# Altium PCB 拼板.PcbDoc (part 1 of 2)
Units mm, origin at the board's own origin, x right, y up, seen from the top; angles counter-clockwise.
Board outline 44.22 x 88.11 mm, 2 copper layers (Top Layer, Bottom Layer); 126 components, 77 nets, 529 pads, 164 vias.
Unrouted connection lines stored in the file: 26.
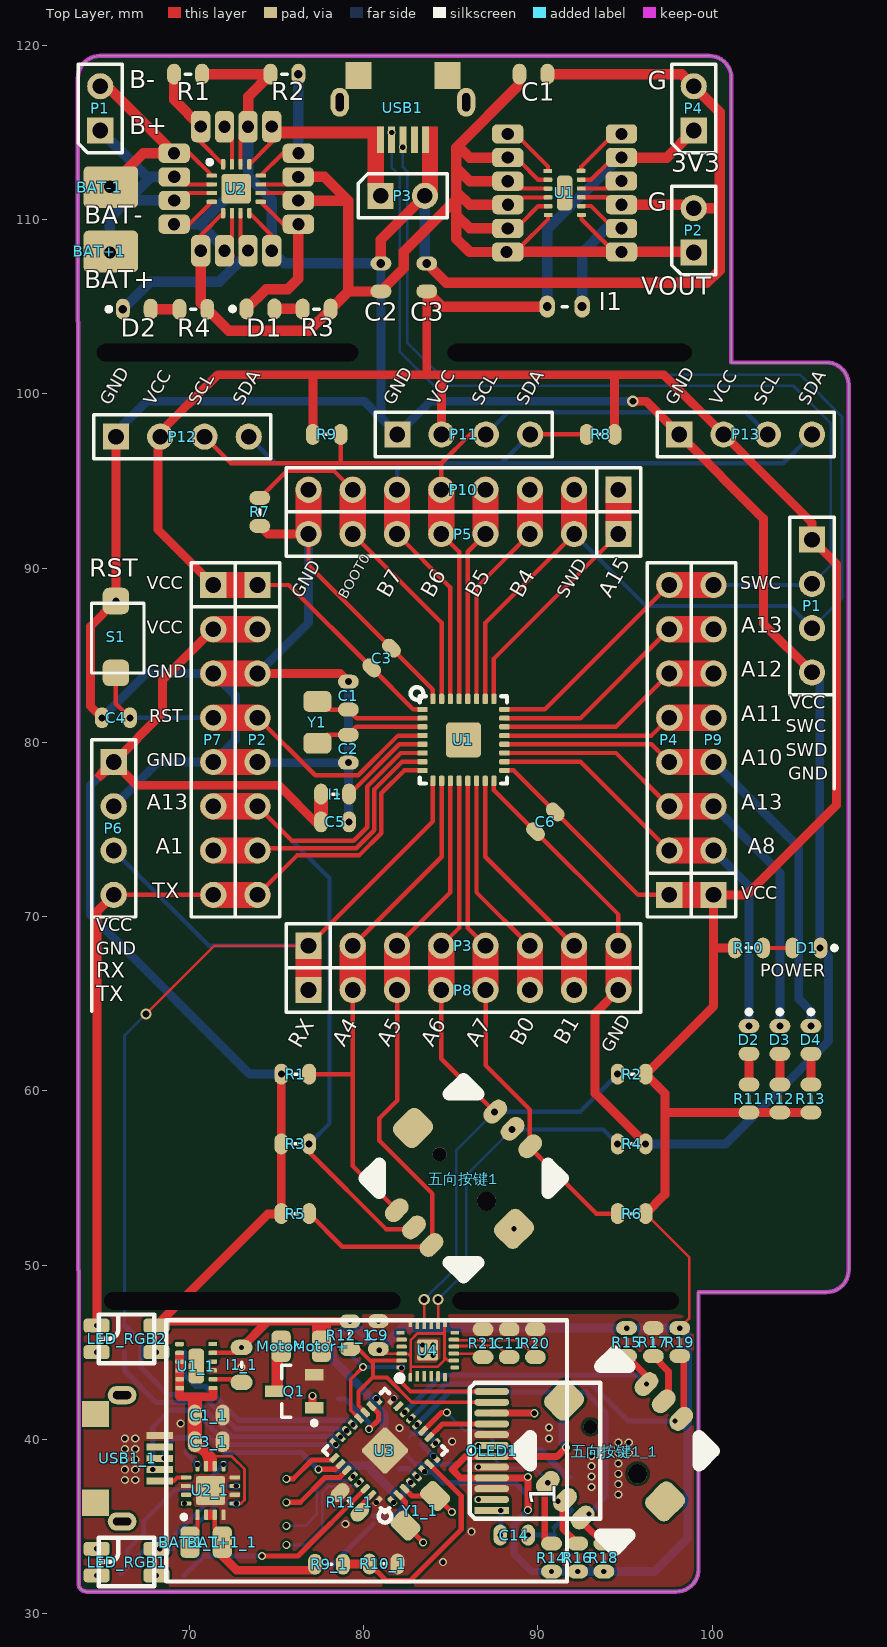
[diagram p0: Top Layer view]
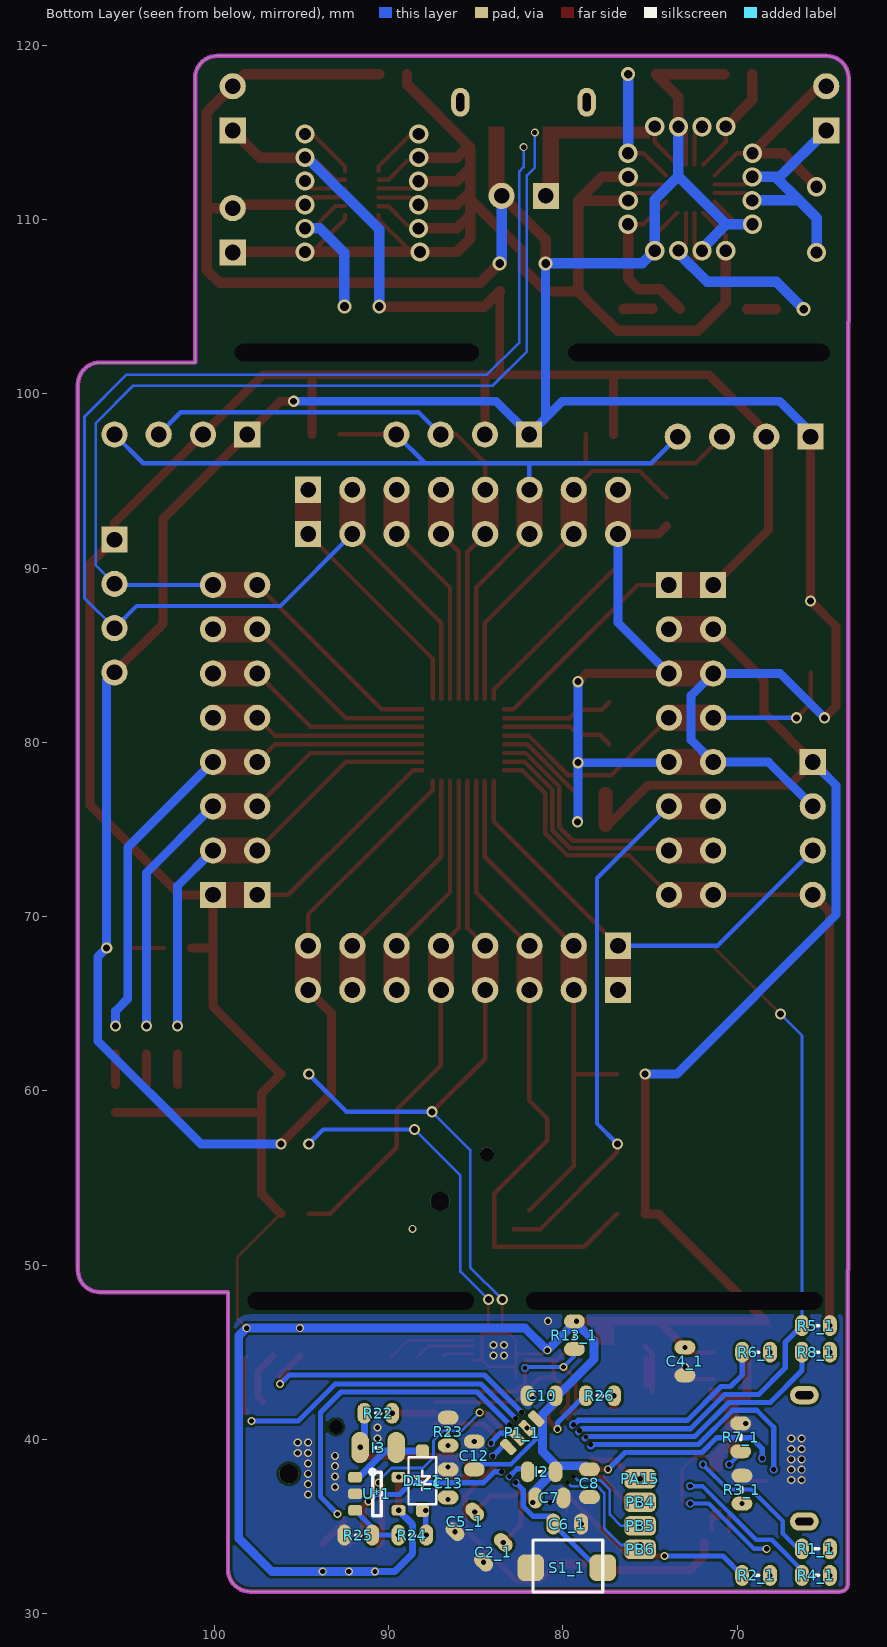
[diagram p1: Bottom Layer view, seen from below]
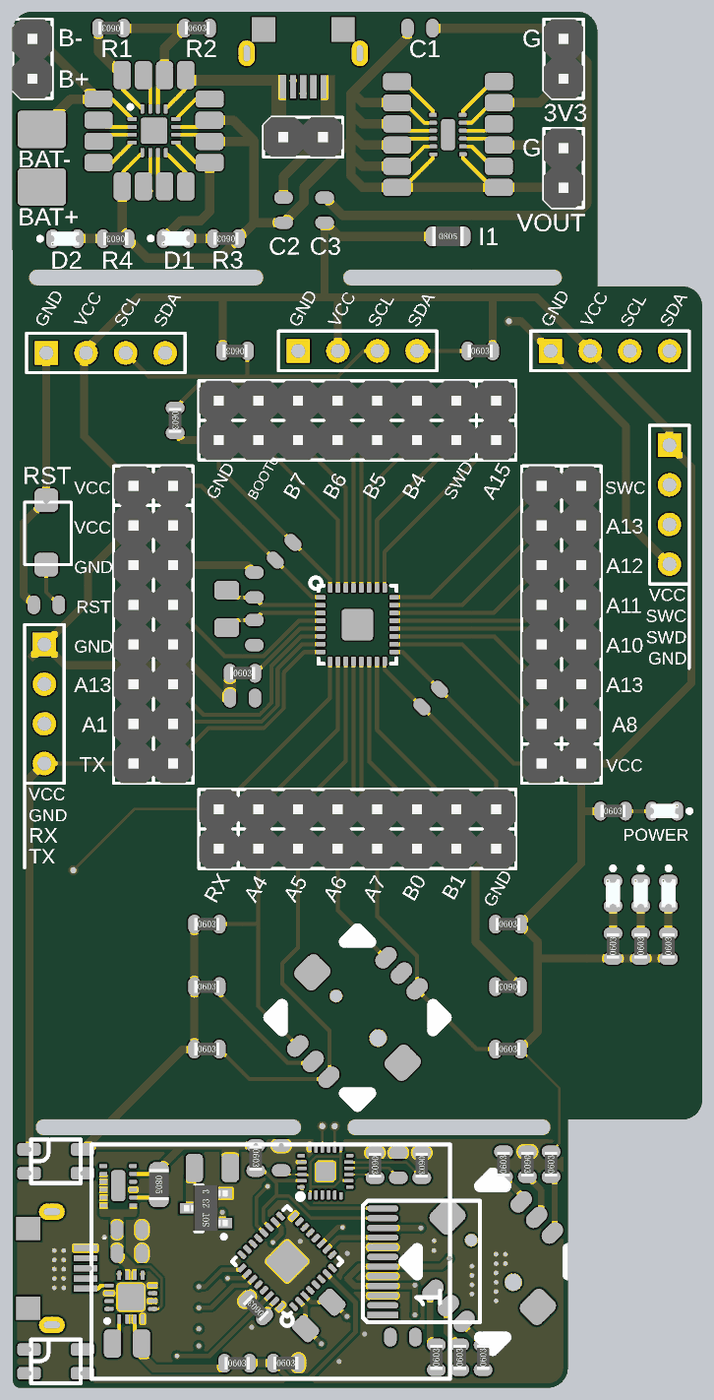
[diagram p3: 3D render of the assembled board from above, using the file's embedded part models]
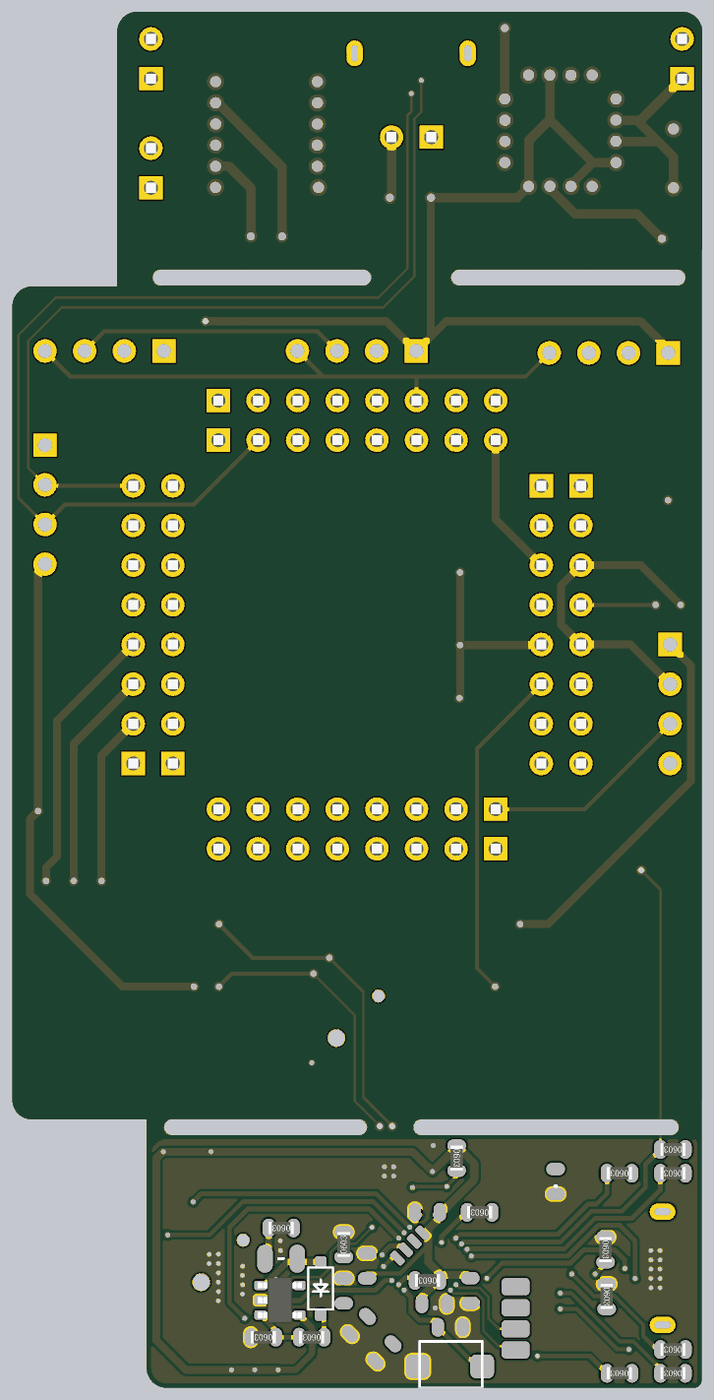
[diagram p4: 3D render of the assembled board from below, using the file's embedded part models]

## Layer stack, top to bottom
Top Solder: solder mask 0.0102, Solder Resist, Dk 3.5
Top Layer: signal copper 0.0356
Dielectric 1: dielectric 0.32, FR-4, Dk 4.8
Bottom Layer: signal copper 0.0356
Bottom Solder: solder mask 0.0102, Solder Resist, Dk 3.5

## Board outline
63.643,31.732 63.643,49.721 63.627,49.721 63.627,104.125 63.604,104.125 63.604,118.113 cw(c64.874,118.113) 64.874,119.383 67.089,119.383 99.83,119.383 cw(c99.83,118.113) 101.1,118.113 101.1,101.79 106.553,101.79 cw(c106.553,100.52) 107.823,100.52 107.823,49.721 cw(c106.553,49.721) 106.553,48.45 99.21,48.45 99.21,32.545 cw(c97.94,32.545) 97.94,31.275 64.101,31.275 cw(c64.101,31.732)

## Design rules (kind name [scope] priority, off if disabled: settings)
Clearance [All] p1: gap=0.152
ComponentClearance [All] p1: gap=0 collisioncheckmode=3 verticalgap=0 showdistances=FALSE
HoleSize [All] p1: absolutevalues=TRUE maxlimit=25.375 minlimit=0.025 maxpercent=80.000 minpercent=20.000
HoleToHoleClearance [All] p1: gap=0.051 allowstackedmicrovias=TRUE
MinimumSolderMaskSliver [All] p1: minsoldermaskwidth=0
PolygonConnect [All] p1: connectstyle=Direct reliefconductorwidth=0.254 reliefentries=4 polygonreliefangle="90 Angle" airgapwidth=0.254
RoutingVias [All] p1: holewidth=0.711 width=1.27 viastyle="Through Hole" minholewidth=0.025 minwidth=0.025 maxholewidth=25.375 maxwidth=25.375
SilkToSilkClearance [All] p1: silktosilkclearance=0
SilkToSolderMaskClearance [IsPad] p1: minsilkscreentomaskgap=0 clearancetoexposedcopper=TRUE
SolderMaskExpansion [All] p1: expansion=0.102
Width [All] p1: maxlimit=999 minlimit=0.152 preferedwidth=0.152
24 further rules are at their usual default settings.

## Components (designator, comment, footprint, x,y, rotation, side; value= is the part's Value field where it differs from the comment)
BAT+1 "BAT" BAT+ 64.849,108.166 r270 top
BAT+1_1 "BAT" BAT+ 71.892,34.094 r180 top (schematic designator BAT+1)
BAT-1 "BAT" BTA- 64.849,111.859 r270 top
BAT-1_1 "BAT" BTA- 70.031,34.094 r180 top (schematic designator BAT-1)
C1 "10uF" 1__0603-CAP_ 89.741,118.334 r180 top
C1 "4.3pF" 1__0603-CAP_ 79.121,82.677 r90 top
C1_1 "10uF" 1__0603-CAP_ 71.111,41.397 r180 top (schematic designator C1)
C2 "4.7uF" 1__0603-CAP_ 80.988,106.677 r90 top
C2 "4.3pF" 1__0603-CAP_ 79.121,79.629 r270 top
C2_1 "4.3pF" 1__0603-CAP_ 83.983,33.522 r315 bottom (schematic designator C2)
C3 "10uF" 1__0603-CAP_ 83.622,106.677 r90 top
C3 "104" 1__0603-CAP_ 81.026,84.836 r45 top
C3_1 "4.7uF" 1__0603-CAP_ 71.111,39.873 r0 top (schematic designator C3)
C4 "100nF" 1__0603-CAP_ 65.786,81.407 r0 top
C4_1 "10uF" 1__0603-CAP_ 72.997,44.479 r270 bottom (schematic designator C4)
C5 "104" 1__0603-CAP_ 78.359,75.438 r0 top
C5_1 "4.3pF" 1__0603-CAP_ 85.621,35.275 r315 bottom (schematic designator C5)
C6 "104" 1__0603-CAP_ 90.424,75.438 r225 top
C6_1 "100nF" 1__0603-CAP_ 79.747,35.148 r0 bottom (schematic designator C6)
C7 "104" 1__0603-CAP_ 80.769,36.647 r180 bottom
C8 "104" 1__0603-CAP_ 78.471,37.491 r270 bottom
C9 "104" 1__0603-CAP_ 80.841,45.989 r270 top
C10 "104" 1__0603-CAP_ 81.22,42.508 r0 bottom
C11 "104" 1__0603-CAP_ 88.351,45.524 r270 top
C12 "0.1uF" 1__0603-CAP_ 85.081,39.079 r90 bottom
C13 "4.7uF" 1__0603-CAP_ 86.58,37.479 r90 bottom
C14 "4.7pF" 1__0603-CAP_ 88.637,34.513 r180 top
D1 "LED" 1__0603-LED_ 74.076,104.866 r180 top
D1 "LED" 1__0603-LED_ 105.41,68.199 r0 top
D1_1 "Diode" 二极管1206 88.059,37.631 r90 bottom (schematic designator D1)
D2 "LED" 1__0603-LED_ 66.982,104.851 r180 top
D2 "LED" 1__0603-LED_ 102.108,62.928 r90 top
D3 "LED" 1__0603-LED_ 103.886,62.928 r90 top
D4 "LED" 1__0603-LED_ 105.664,62.928 r90 top
I1 "2.2uH" 1__0805_IND 91.531,104.999 r0 top
I1 "100uH" 1__0603_Ind_ 78.359,77.025 r0 top
I1_1 "2.2uH" 1__0805_IND 72.997,44.279 r270 top (schematic designator I1)
I2 "100uH" 1__0603_IND_ 81.214,38.145 r0 bottom
I3 "6.8uH" 0805_Ind 90.593,39.539 r180 bottom
LED_RGB1 "L*" 1__LED_RGB 64.678,33.726 r0 top
LED_RGB2 "L*" 1__LED_RGB 64.678,46.534 r0 top
Motor+ "BAT" BAT+ 77.582,45.334 r180 top
Motor- "BAT" BTA- 75.27,45.334 r180 top
OLED1 "0.73_OLED" 0.73OLED 94.333,39.344 r90 top
P1 "Header 2" HDR1X2 64.887,115.103 r90 top
P1 "" HDR1X4 105.727,91.63 r270 top
P1_1 "蓝牙" BT 81.521,41.191 r225 bottom (schematic designator P1)
P2 "Header 2" HDR1X2 98.941,108.107 r90 top
P2 "Header 8" HDR1X8 73.914,89.027 r270 top
P3 "Header 2" HDR1X2 80.973,111.354 r0 top
P3 "Header 8" HDR1X8 76.835,68.326 r0 top
P4 "Header 2" HDR1X2 98.941,115.103 r90 top
P4 "Header 8" HDR1X8 97.536,71.247 r90 top
P5 "Header 8" HDR1X8 94.615,91.948 r180 top
P6 "蓝牙" HDR1X4 65.659,78.867 r270 top
P7 "Header 8" HDR1X8 71.374,89.027 r270 top
P8 "Header 8" HDR1X8 76.835,65.786 r0 top
P9 "Header 8" HDR1X8 100.076,71.247 r90 top
P10 "Header 8" HDR1X8 94.615,94.488 r180 top
P11 "" HDR1X4 81.931,97.663 r0 top
P12 "" HDR1X4 65.786,97.536 r0 top
P13 "" HDR1X4 98.108,97.663 r0 top
PA15 "BAT" BAT+ 75.574,37.742 r90 bottom
PB4 "BAT" BAT+ 75.574,36.393 r90 bottom
PB5 "BAT" BAT+ 75.574,35.044 r90 bottom
PB6 "BAT" BAT+ 75.55,33.7 r270 bottom
Q1 "NPN-J3Y/Y1" SOT23 76.013,42.768 r180 top
R1 "1K" 1__0603-RES_ 69.925,118.334 r180 top
R1 "220K" 1__0603-RES_ 76.073,60.96 r0 top
R1_1 "4K7" 1__0603-RES_ 65.478,33.726 r0 bottom (schematic designator R1)
R2 "1K" 1__0603-RES_ 75.454,118.334 r0 top
R2 "220K" 1__0603-RES_ 95.377,60.96 r0 top
R2_1 "4K7" 1__0603-RES_ 68.907,32.202 r0 bottom (schematic designator R2)
R3 "4K7" 1__0603-RES_ 77.3,104.859 r180 top
R3 "220K" 1__0603-RES_ 76.073,56.959 r0 top
R3_1 "1K" 1__0603-RES_ 69.726,37.122 r270 bottom (schematic designator R3)
R4 "4K7" 1__0603-RES_ 70.226,104.846 r180 top
R4 "330" 1__0603-RES_ 95.377,56.959 r180 top
R4_1 "4K7" 1__0603-RES_ 65.478,32.202 r0 bottom (schematic designator R4)
R5 "220K" 1__0603-RES_ 76.073,52.959 r0 top
R5_1 "4K7" 1__0603-RES_ 65.478,46.534 r0 bottom (schematic designator R5)
R6 "220K" 1__0603-RES_ 95.377,52.959 r0 top
R6_1 "4K7" 1__0603-RES_ 68.907,45.01 r0 bottom (schematic designator R6)
R7 "10K" 1__0603-RES_ 74.041,93.218 r270 top
R7_1 "1K" 1__0603-RES_ 69.797,40.12 r270 bottom (schematic designator R7)
R8 "220K" 1__0603-RES_ 93.599,97.663 r0 top
R8_1 "4K7" 1__0603-RES_ 65.478,45.01 r0 bottom (schematic designator R8)
R9 "220K" 1__0603-RES_ 77.883,97.663 r180 top
R9_1 "5M" 1__0603-RES_ 78.013,32.843 r0 top (schematic designator R9)
R10 "4K7" 1__0603-RES_ 102.108,68.199 r0 top
R10_1 "5M" 1__0603-RES_ 81.138,32.856 r0 top (schematic designator R10)
R11 "4K7" 1__0603-RES_ 102.108,59.563 r90 top
R11_1 "10K" 1__0603-RES_ 79.214,36.388 r135 top (schematic designator R11)
R12 "4K7" 1__0603-RES_ 103.886,59.563 r90 top
R12_1 "220K" 1__0603-RES_ 79.209,45.983 r270 top (schematic designator R12)
R13 "4K7" 1__0603-RES_ 105.664,59.563 r90 top
R13_1 "220K" 1__0603-RES_ 79.341,45.981 r270 bottom (schematic designator R13)
R14 "220K" 1__0603-RES_ 90.783,33.224 r90 top
R15 "220K" 1__0603-RES_ 95.089,45.588 r90 top
R16 "220K" 1__0603-RES_ 92.282,33.224 r90 top
R17 "330" 1__0603-RES_ 96.619,45.588 r270 top
R18 "220K" 1__0603-RES_ 93.78,33.224 r90 top
R19 "220K" 1__0603-RES_ 98.137,45.588 r90 top
R20 "10K" 1__0603-RES_ 89.85,45.524 r270 top
R21 "10K" 1__0603-RES_ 86.853,45.524 r270 top
R22 "220K" 1__0603-RES_ 90.593,41.504 r0 bottom
R23 "510K" 1__0603-RES_ 86.58,40.45 r90 bottom
R24 "1.43M" 1__0603-RES_ 88.637,34.513 r0 bottom
R25 "205K" 1__0603-RES_ 91.736,34.513 r0 bottom
R26 "10K" 1__0603-RES_ 77.867,42.508 r0 bottom
S1 "" key3*4*2 65.786,86.042 r270 top
S1_1 "" KEY3*4*2 79.772,32.64 r180 bottom (schematic designator S1)
U1 "TPS62742" TPS62742 91.531,111.519 r180 top
U1 "STM32L432Kx" STM32L432#1 85.725,80.137 r0 top
U1_1 "TPS62742" TPS62742 70.393,44.213 r180 top (schematic designator U1)
U2 "BQ24078" BQ24078#1 72.69,111.763 r0 top
U2_1 "BQ24078" BQ24078#2 71.21,37.075 r90 top (schematic designator U2)
U3 "STM32L432Kx" STM32L432#2 81.22,39.365 r135 top
U4 "MPU9250" "1__QFN3*3 (改1)" 83.673,45.127 r90 top
U*1 "OLED升压" 1__SOT23-5 90.669,36.883 r180 bottom
USB1 "USB-5P" "1__Micro USB 立贴_" 82.253,113.822 r0 top
USB1_1 "USB-5P" "1__MICRO USB 立贴_" 69.042,38.92 r90 top (schematic designator USB1)
Y1 "32.768K" OSC32 77.331,79.944 r90 top
Y1_1 "32.768K" OSC32 84.109,36.748 r225 top (schematic designator Y1)
五向按键1 "五向按键" 1__五向按键_ 85.73,54.98 r45 top
五向按键1_1 "五向按键" 1__五向按键_ 94.398,39.344 r45 top (schematic designator 五向按键1)

## Footprints (in the part's own frame and the unit in brackets; to place one, negate y for a bottom-side part, rotate by r counter-clockwise, add the part's x,y. Pads: shape width x height; smd on the part's side, far side on the other; paste and mask are expansions set on the pad)
0.73OLED [mm]
  rect 0.4x2 smd: 1(-3.41,6.985)
  oval 0.4x2 smd: 2(-2.79,6.985) 3(-2.17,6.985) 4(-1.55,6.985) 5(-0.93,6.985) 6(-0.31,6.985) 7(0.31,6.985) 8(0.93,6.985) 9(1.55,6.985) 10(2.17,6.985) 11(2.79,6.985) 12(3.41,6.985)
  silkscreen extent -7.49,0.76 7.51,25.67
1__0603-CAP_ [mm]
  oval 0.8x1.2 smd: 1(-0.8,0) 2(0.8,0)
  body extent -0.88,-0.48 0.87,0.48, height 0.85
1__0603-LED_ [mm]
  oval 0.8x1.2 smd: 1(-0.8,0) 2(0.8,0)
  silkscreen extent 1.47,-0.12 1.72,0.12, body extent -0.9,-0.45 0.9,0.45, height 0.8
1__0603-RES_ [mm]
  oval 0.8x1.2 smd: 1(-0.8,0) 2(0.8,0)
  silkscreen extent -0.15,0 0.15,0, body extent -0.8,-0.4 0.8,0.4, height 0.45
1__0603_Ind_ [mm]
  oval 0.8x1.2 smd: 1(-0.8,0) 2(0.8,0)
  silkscreen extent -0.15,0 0.15,0, body extent -0.8,-0.4 0.8,0.4, height 0.45
1__0603_IND_ [mm]
  oval 0.8x1.2 smd: 1(-0.8,0) 2(0.8,0)
  silkscreen extent -0.15,0 0.15,0, body extent -0.8,-0.4 0.8,0.4, height 0.45
1__0805_IND [mm]
  oval 0.889x1.27 smd: 1(-1,0) 2(1,0)
  silkscreen extent -0.15,0 0.15,0, body extent -1,-0.63 1,0.63, height 0.55
1__LED_RGB [mm]
  rrect50% 1.5x0.8 smd: 1(0,0) 2(3.429,0) 3(0,-1.524) 4(3.429,-1.524)
  silkscreen extent 0.13,-2.16 3.3,0.64
"1__Micro USB 立贴_" [mm]
  oval 1.05x1.65 hole 0.45 slot 1.05 at 90 deg: 0(-3.625,2.9) 0(3.625,2.9)
  rect 1.5x1.55 smd: 0(-2.55,4.425) 0(2.55,4.425)
  rect 0.4x1.51 smd: 1(-1.3,0.75) 2(-0.65,0.75) 3(0,0.75) 4(0.65,0.75) 5(1.3,0.75)
"1__MICRO USB 立贴_" [mm]
  oval 1.05x1.65 hole 0.45 slot 1.05 at 90 deg: 0(-3.625,2.9) 0(3.625,2.9)
  rect 1.5x1.55 smd: 0(-2.55,4.425) 0(2.55,4.425)
  rect 0.4x1.51 smd: 1(-1.3,0.75) 2(-0.65,0.75) 3(0,0.75) 4(0.65,0.75) 5(1.3,0.75)
"1__QFN3*3 (改1)" [mm]
  rrect50% 0.48x0.22 smd: 1(-1.56,0.999) 6(-1.56,-0.999) 13(1.56,-0.999) 18(1.56,0.999)
  rrect50% 0.6x0.22 smd: 2(-1.5,0.6) 3(-1.5,0.2) 4(-1.5,-0.2) 5(-1.5,-0.6) 14(1.5,-0.6) 15(1.5,-0.2) 16(1.5,0.2) 17(1.5,0.6)
  rrect50% 0.22x0.48 smd: 7(-0.999,-1.56) 12(0.999,-1.56) 19(0.999,1.56) 24(-0.999,1.56)
  rrect50% 0.22x0.6 smd: 8(-0.6,-1.5) 9(-0.2,-1.5) 10(0.2,-1.5) 11(0.6,-1.5) 20(0.6,1.5) 21(0.2,1.5) 22(-0.2,1.5) 23(-0.6,1.5)
  rrect20% 1.2x1.2 smd: 18(0,0)
  silkscreen extent -1.83,1.39 -1.39,1.82
1__SOT23-5 [mm]
  rrect50% 0.8x0.6 smd: 1(-1.245,0.95) 2(-1.245,0) 3(-1.245,-0.95) 4(1.245,-0.95) 5(1.245,0.95)
  silkscreen extent -0.38,-1.25 0.25,1.37, body extent -1.42,-1.46 1.42,1.46
1__五向按键_ [mm]
  rrect50% 2x1.8 smd: 0(0,4.096) 0(0.004,-4.096)
  round 0.8 hole 0.8: 0(0.004,1.949)
  round 1.1 hole 1.1: 0(0.004,-1.861)
  oval 1.524x1 smd: 1(-4,1.419) 2(-4.001,0.022) 3(-4.001,-1.403) 4(4,1.419) 5(4.001,0.022) 6(4.001,-1.403)
  silkscreen extent -4,-4 4,4
0805_Ind [mm]
  oval 1x1.8 smd: 1(-1.035,0) 2(1.035,0)
  silkscreen extent -0.15,0 0.15,0, body extent -1,-0.63 1,0.63, height 0.25
BAT+ [mm]
  rrect50% 1.1x1.8 smd: 1(0.003,-0.012)
BQ24078#1 [mm] "充电芯片"
  rrect20% 1.68x1.68 smd: 0(0,0)
  rrect50% 0.6x0.24 smd: 1(-1.4,0.75) 2(-1.4,0.25) 3(-1.4,-0.25) 4(-1.4,-0.75) 9(1.4,-0.75) 10(1.4,-0.25) 11(1.4,0.25) 12(1.4,0.75)
  rrect50% 0.24x0.6 smd: 5(-0.75,-1.4) 6(-0.25,-1.4) 7(0.25,-1.4) 8(0.75,-1.4) 13(0.75,1.4) 14(0.25,1.4) 15(-0.25,1.4) 16(-0.75,1.4)
  silkscreen extent -1.65,1.4 -1.4,1.65
BQ24078#2 [mm] "充电芯片"
  rrect50% 0.6x0.24 smd: 1(-1.4,0.75) 2(-1.4,0.25) 3(-1.4,-0.25) 4(-1.4,-0.75) 9(1.4,-0.75) 10(1.4,-0.25) 11(1.4,0.25) 12(1.4,0.75)
  rrect50% 0.24x0.6 smd: 5(-0.75,-1.4) 6(-0.25,-1.4) 7(0.25,-1.4) 8(0.75,-1.4) 13(0.75,1.4) 14(0.25,1.4) 15(-0.25,1.4) 16(-0.75,1.4)
  rrect20% 1.68x1.68 smd: 8(0,0)
  silkscreen extent -1.65,1.4 -1.4,1.65
BT [mm]
  rrect50% 1x0.5 smd: 1(0,0) 2(0,-0.762) 3(0,-1.524) 4(0,-2.286)
BTA- [mm]
  rrect50% 1.1x1.8 smd: 2(0.003,-0.012)
HDR1X2 [mm] "Connector; Header; 2 Position"
  rect 1.5x1.5 hole 0.9: 1(0,0)
  round 1.5 hole 0.9: 2(2.54,0)
  silkscreen extent -1.27,-1.27 3.81,1.27, body extent -1.27,-1.27 3.81,1.27, height 8.54
HDR1X4 [mm] "Connector; Header; 4 Position"
  rect 1.5x1.5 hole 0.9: 1(0,0)
  round 1.5 hole 0.9: 2(2.54,0) 3(5.08,0) 4(7.62,0)
  silkscreen extent -1.27,-1.27 8.89,1.27
HDR1X8 [mm] "Connector; Header; 8 Position"
  rect 1.5x1.5 hole 0.9: 1(0,0)
  round 1.5 hole 0.9: 2(2.54,0) 3(5.08,0) 4(7.62,0) 5(10.16,0) 6(12.7,0) 7(15.24,0) 8(17.78,0)
  silkscreen extent -1.27,-1.27 19.05,1.27, body extent -1.27,-1.27 19.05,1.27, height 8.54
key3*4*2 [mil]
  rrect50% 60x60 smd: 1(-81.24,0) 2(81.24,0)
  silkscreen extent -76,-55 81,63
KEY3*4*2 [mil]
  rrect50% 60x60 smd: 1(-81.24,0) 2(81.24,0)
  silkscreen extent -76,-55 81,63
OSC32 [mm]
  rrect50% 1.2x1.6 smd: 1(0.003,-0.012) 2(2.403,-0.012)
SOT23 [mm] "SOT23, 3-Leads, Body 2.90x2.40mm, Pitch 0.95mm, IPC Medium Density"
  rect 1.05x0.65 smd: 1(-1.15,0.95) 2(-1.15,-0.95) 3(1.15,0)
  silkscreen extent -1.28,-1.5 0.7,1.95, body extent -1.4,-1.45 1.4,1.45, height 1.2
STM32L432#1 [mm]
  rrect20% 2x2 smd: 0(0,0)
  rrect50% 0.6x0.3 smd: 1(-2.35,1.75) 2(-2.35,1.25) 3(-2.35,0.75) 4(-2.35,0.25) 5(-2.35,-0.25) 6(-2.35,-0.75) 7(-2.35,-1.25) 8(-2.35,-1.75) 17(2.35,-1.75) 18(2.35,-1.25) 19(2.35,-0.75) 20(2.35,-0.25) 21(2.35,0.25) 22(2.35,0.75) 23(2.35,1.25) 24(2.35,1.75)
  rrect50% 0.3x0.6 smd: 9(-1.75,-2.35) 10(-1.25,-2.35) 11(-0.75,-2.35) 12(-0.25,-2.35) 13(0.25,-2.35) 14(0.75,-2.35) 15(1.25,-2.35) 16(1.75,-2.35) 25(1.75,2.35) 26(1.25,2.35) 27(0.75,2.35) 28(0.25,2.35) 29(-0.25,2.35) 30(-0.75,2.35) 31(-1.25,2.35) 32(-1.75,2.35)
  silkscreen extent -3.02,-2.5 2.5,3.03
STM32L432#2 [mm]
  rrect50% 0.6x0.3 smd: 1(-2.35,1.75) 2(-2.35,1.25) 3(-2.35,0.75) 4(-2.35,0.25) 5(-2.35,-0.25) 6(-2.35,-0.75) 7(-2.35,-1.25) 8(-2.35,-1.75) 17(2.35,-1.75) 18(2.35,-1.25) 19(2.35,-0.75) 20(2.35,-0.25) 21(2.35,0.25) 22(2.35,0.75) 23(2.35,1.25) 24(2.35,1.75)
  rrect50% 0.3x0.6 smd: 9(-1.75,-2.35) 10(-1.25,-2.35) 11(-0.75,-2.35) 12(-0.25,-2.35) 13(0.25,-2.35) 14(0.75,-2.35) 15(1.25,-2.35) 16(1.75,-2.35) 25(1.75,2.35) 26(1.25,2.35) 27(0.75,2.35) 28(0.25,2.35) 29(-0.25,2.35) 30(-0.75,2.35) 31(-1.25,2.35) 32(-1.75,2.35)
  rrect20% 2x2 smd: 32(0,0)
  silkscreen extent -3.03,-2.5 2.5,3.03
TPS62742 [mm] "稳压芯片"
  rrect50% 0.9x2 smd: 0(0,0)
  rrect50% 0.5x0.25 smd: 1(-0.961,1.261) 2(-0.958,0.756) 3(-0.954,0.251) 4(-0.95,-0.254) 5(-0.946,-0.759) 6(-0.942,-1.264) 7(0.961,-1.261) 8(0.958,-0.756) 9(0.954,-0.251) 10(0.95,0.254) 11(0.946,0.759) 12(0.942,1.264)
二极管1206 [mm]
  rrect50% 0.75x0.75 smd: 1(1.7,0) 2(-1.7,0)
  silkscreen extent -1.35,-0.8 1.35,0.8

## Part data
C1 C1 C1_1 C2 C2 C2_1 C3 C3 C3_1 C4 C4_1 C5 C5_1 C6 C6_1 C7 C8 C9 C10 C11 C12 C13 C14: library part Cap, "Capacitor"
D1 D1 D2 D2 D3 D4: library part LED0, "Typical INFRARED GaAs LED"
D1_1: "Default Diode"
I1 I1 I1_1 I2 I3: library part 电感
LED_RGB1 LED_RGB2: library part LED_RGB
P1 P2 P3 P4: "Header, 2-Pin"
P1 P1_1 P6 P11 P12 P13: library part "Header 4", "Header, 4-Pin"
P2 P3 P4 P5 P7 P8 P9 P10: "Header, 8-Pin"
Q1: library part "NPN BC817-40", "NPN Bipolar Transistor"
R1 R1 R1_1 R2 R2 R2_1 R3 R3 R3_1 R4 R4 R4_1 R5 R5_1 R6 R6_1 R7 R7_1 R8 R8_1 R9 R9_1 R10 R10_1 R11 R11_1 R12 R12_1 R13 R13_1 R14 R15 R16 R17 R18 R19 R20 R21 R22 R23 R24 R25 R26: library part Res2, "Resistor"
S1 S1_1: library part SW-PB, "Switch"
U1 U1_1: "锂电池稳压"
U1 U3: "单片机"
U2 U2_1: "充电芯片"
U*1: library part TPS61040
USB1 USB1_1: "USB CONNECTOR"
Y1 Y1_1: library part XTAL, "Crystal Oscillator"

## Free pads (board coordinates)
  rrect50% 1.8x1.1 smd: 0(64.836,107.518) 0(64.836,111.211) 0(64.837,108.808) 0(64.837,112.501) 0(66.148,107.518) 0(66.148,111.211) 0(66.149,108.163) 0(66.149,111.856) 0(66.149,108.808) 0(66.149,112.501) 0(69.125,109.726) 0(69.125,113.799) 0(69.131,112.443) 0(69.137,111.088) 0(76.242,112.437) 0(76.248,111.082) 0(76.254,109.726) 0(76.254,113.799) 0(88.265,114.903) 0(88.269,108.131) 0(88.269,113.549) 0(88.273,109.486) 0(88.273,112.194) 0(88.276,110.84) 0(94.786,112.197) 0(94.79,110.843) 0(94.79,113.552) 0(94.794,109.489) 0(94.794,114.906) 0(94.798,108.134)
  rrect50% 1.1x1.8 smd: 0(70.654,108.198) 0(70.654,115.327) 0(72.009,108.204) 0(72.015,115.315) 0(73.364,108.21) 0(73.37,115.321) 0(74.726,108.198) 0(74.726,115.327)
  round 0 hole 1 slot 15 at 0 deg: 0(72.187,102.362)
  round 0 hole 1 slot 17 at 0 deg: 0(73.609,47.955)
  round 0 hole 1 slot 13 at 0 deg: 0(91.592,47.955)
  round 0 hole 1 slot 14 at 0 deg: 0(91.821,102.362)

## Via types
v1: diameter 0.46, hole 0.3, Top Layer to Bottom Layer, tented both sides, 77 vias
v2: diameter 0.3, hole 0.3, Top Layer to Bottom Layer, tented both sides, 30 vias
v3: diameter 1.1, hole 0.7, Top Layer to Bottom Layer, tented both sides, 30 vias
v4: diameter 0.64, hole 0.4, Top Layer to Bottom Layer, tented both sides, 21 vias
v5: diameter 0.8, hole 0.5, Top Layer to Bottom Layer, tented both sides, 6 vias

## Nets (pads, with @x,y where several pads share a name; then routed paths per layer and width w, separated by ;. In a path a pad name is that pad's centre, name@x,y a point inside that pad or via, vN(x,y) a via of type N, cw(c..) or ccw(c..) an arc to the next point about the centre after c; other vN are vias at no path point)
ADC: R9_1.2 R10_1.1 U3.7 | length 12.9
  Top Layer w0.152: R9_1.2@78.813,32.843 R9_1.2@78.826,32.856
  Top Layer w0.3: R10_1.1@80.338,32.856 81.303,31.891 82.662,31.891 85.602,34.831 85.602,36.751 U3.7@83.766,38.587
  Top Layer w0.508: R9_1.2@78.826,32.856 R10_1.1@80.338,32.856
BAT-POWER: BAT+1.1 BAT+1_1.1 P1.1@64.887,115.103 pad.0@64.836,107.518 pad.0@64.837,108.808 pad.0@66.148,107.518 pad.0@66.149,108.163 pad.0@66.149,108.808 pad.0@69.131,112.443 pad.0@69.137,111.088 R9_1.1 U2.2 U2.3 U2_1.2 U2_1.3 | length 24.6
  Top Layer w0.24: v3(69.131,112.443) 69.562,112.013 U2.2@71.29,112.013 ; pad.0@69.568,111.519 U2.3@71.296,111.519 ; BAT+1_1.1@71.46,34.862 U2_1.3@71.46,35.675
  Top Layer w0.508: BAT+1_1.1@71.889,34.106 71.889,33.32 72.712,32.497 R9_1.1@77.173,32.497
  Bottom Layer w0.6: P1.1@64.887,115.103 67.546,112.443 67.805,112.443 ; v3(65.443,108.107) 65.443,110.081 66.45,111.088 ; v3(69.131,112.443) 67.805,112.443 ; v3(69.137,111.088) 66.45,111.088 ; 66.45,111.088 67.805,112.443
BOOT0: P5.7 P10.7 R7.1 R11_1.1 U1.31 U3.31 | length 21.8
  Top Layer w0.152: R11_1.1@79.779,35.822 R11_1.1@79.779,36.156
  Top Layer w0.254: R7.1@74.041,94.018 75.591,95.567 78.295,95.567 P10.7@79.375,94.488 ; P5.7@79.375,91.948 84.475,86.848 U1.31@84.475,82.487
  Top Layer w0.3: R11_1.1@79.779,36.156 U3.31@80.442,36.819
  Top Layer w1.5: P5.7@79.375,91.948 P10.7@79.375,94.488
Charging-STA: D1.2@73.276,104.866 pad.0@76.254,109.726 R1_1.2 U2.9 U2_1.9 | length 18.4
  Top Layer w0.24: U2.9@74.09,111.013 75.376,109.726 v3(76.254,109.726)
  Top Layer w0.6: D1.2@73.276,104.866 74.402,105.992 75.652,105.992 76.254,106.594 v3(76.254,109.726)
  Bottom Layer w0.254: R1_1.2@66.441,33.411 66.441,33.653 67.371,34.583 67.371,35.307 69.193,37.129 70.528,37.129 v2@71.88,38.482 ; v2(71.957,38.558) v2@71.88,38.482 ; v2@71.88,38.482 ccw(c71.957,38.558) 72.065,38.558 ccw(c71.957,38.558) v2@71.88,38.482
GND: C1.1@90.541,118.334 C1.2@79.121,83.477 C1_1.1 C2.2 C2_1.2 C3.2 C3_1.2 C4.1 C4_1.2 C5.2 C5_1.2 C6.2 C6_1.1 C7.2 C8.2 C9.1 C10.2 C11.1 C12.2 C13.2 D1.2@106.21,68.199 OLED1.3 OLED1.5 OLED1.8 P1.4 P1_1.2 P2.2@98.941,110.647 P2.3 P2.5 P3.2@83.513,111.354 P3.8 P4.2@98.941,117.643 P5.8 P6.2 P7.3 P7.5 P8.8 P10.8 P11.1 P12.1 P13.1 pad.0@69.125,109.726 pad.0@72.009,108.204 pad.0@73.37,115.321 pad.0@74.726,108.198 pad.0@94.79,110.843 Q1.2 R1.1@70.725,118.334 R2.1@74.654,118.334 R3_1.1 R4.1@96.177,56.959 R7.2 R7_1.1 R10_1.2 R11_1.2 R17.1 R20.1 R21.1 R23.2 R25.2 S1.1 S1_1.1 U1.3@92.485,111.268 U1.16 U1.32 U1_1.3 U2.4 U2.6 U2.8 U2.14 U2_1.4 U2_1.6 U2_1.8 U2_1.14 U3.16 U3.32 U4.18 U4.20 U*1.2 USB1.5 USB1_1.5 | length 305.2
  Top Layer w0.152: v1(80.846,46.788) C9.1@80.966,46.667 ; U3.32@81.22,39.365 U3.32@81.22,39.813
  Top Layer w0.24: v3(69.125,109.726) 70.004,109.726 U2.4@71.29,111.013 ; v3(72.009,108.204) 72.44,108.635 U2.6@72.44,110.363 ; U2.14@72.946,113.169 U2.14@72.94,113.163 72.94,114.89 v3(73.37,115.321) ; U2.8@73.44,110.363 74.726,109.076 v3(74.726,108.198) ; U1.3@92.485,111.268 94.366,111.268 v3(94.79,110.843) ; P2.2@98.745,110.843 P2.2@98.941,110.647
  Top Layer w0.254: P12.1@65.659,97.663 P12.1@65.786,97.536 ; P5.8@76.835,91.948 76.835,90.158 C3.2@81.592,85.402 83.975,83.018 U1.32@83.975,82.487 ; U1.16@87.475,77.787 87.475,77.256 C6.2@89.858,74.872 94.615,70.116 P3.8@94.615,68.326
  Top Layer w0.508: v4(64.986,81.407) 64.325,82.068 64.325,86.645 v4(65.786,88.106) P12.1@65.786,97.536 ; P2.3@73.914,83.947 78.651,83.947 v4(79.121,83.477) ; R7.2@74.041,92.418 74.511,91.948 P5.8@76.835,91.948 ; P8.8@94.615,65.786 93.281,64.453 93.281,59.855 v4(96.177,56.959) ; v4(95.441,99.568) 96.203,99.568 P13.1@98.108,97.663 102.933,92.837 102.933,86.804 P1.4@105.727,84.01
  Top Layer w0.6: R1.1@70.725,118.334 R2.1@74.654,118.334 73.37,117.05 v3(73.37,115.321) ; v3(72.009,108.204) pad.0@72.311,107.902 ; v5(80.988,107.477) 80.988,108.829 P3.2@83.513,111.354 ; v5(83.622,107.477) 84.742,106.357 99.682,106.357 100.421,107.097 100.421,110.594 ; C1.1@90.541,118.334 98.25,118.334 P4.2@98.941,117.643 100.421,116.162 100.421,110.594 ; v3(94.79,110.843) P2.2@98.745,110.843 ; P2.2@98.941,110.647 100.368,110.647 100.421,110.594
  Top Layer w1.5: P7.5@71.374,78.867 P2.5@73.914,78.867 ; P7.3@71.374,83.947 P2.3@73.914,83.947 ; P5.8@76.835,91.948 P10.8@76.835,94.488 ; P8.8@94.615,65.786 P3.8@94.615,68.326
  Bottom Layer w0.152: 80.924,98.67 80.988,98.733
  Bottom Layer w0.254: P2.5@73.914,78.867 P2.5@73.952,78.829 ; C10.2@81.83,42.343 ccw(c81.722,42.343) C10.2@81.83,42.343
  Bottom Layer w0.508: v4(64.986,81.407) 67.526,83.947 P7.3@71.374,83.947 72.644,82.677 72.644,80.137 P7.5@71.374,78.867 68.199,78.867 P6.2@65.659,76.327 ; P12.1@65.659,97.663 67.564,99.568 80.026,99.568 80.924,98.67 P11.1@81.931,97.663 83.836,99.568 v4(95.441,99.568) ; P2.3@73.914,83.947 76.835,86.868 P5.8@76.835,91.948 ; P2.5@73.952,78.829 v4(79.121,78.829) ; v4@79.121,75.438 v4(79.121,78.829) ; v4(79.121,83.477) v4(79.121,78.829) ; 80.988,98.733 v5(80.988,107.477) ; v4(96.177,56.959) 100.774,56.959 106.68,62.865 106.68,67.691 v4(106.172,68.199) 106.172,83.566 P1.4@105.727,84.01
  Bottom Layer w0.6: v3(69.125,109.726) 70.615,109.726 ; v3(72.009,108.204) 72.009,108.332 70.615,109.726 ; v3(73.37,115.321) 73.37,112.482 ; v5(80.988,107.477) 75.446,107.477 v3(74.726,108.198) 74.726,111.127 73.37,112.482 ; P3.2@83.513,111.354 83.513,107.587 v5(83.622,107.477) ; 70.615,109.726 73.37,112.482
  other v1: 84.549,32.956 86.186,34.709 78.947,35.148 94.612,36.837 93.069,37.272 94.612,37.434 66.298,37.669 66.895,37.669 93.069,37.869 94.612,38.031 66.298,38.266 66.895,38.266 93.069,38.465 94.612,38.628 66.298,38.863 66.895,38.863 93.069,39.062 94.612,39.225 95.209,39.225 66.298,39.46 66.895,39.46 94.612,39.822 95.209,39.822 85.081,39.879 66.298,40.057 66.895,40.057 90.631,40.057 82.059,40.653 90.637,40.685 69.504,40.914 72.997,44.146 83.381,44.821 83.978,44.821 83.381,45.418 83.978,45.418
  other v2: 80.719,36.386 86.592,38.417 81.722,42.343
  other v4: 79.159,75.438
KEY-Down: P3.4 P8.4 pad.0@91.592,47.955 R2.1@94.577,60.96 R19.1 U1.12@85.475,77.787 U3.13 五向按键1.4 五向按键1_1.6 | length 58.7
  Top Layer w0.152: R19.1@98.137,44.788 R19.1@98.365,44.559
  Top Layer w0.254: P8.4@84.455,65.786 84.455,61.849 v4(87.503,58.801) ; P3.4@84.455,68.326 85.475,69.346 U1.12@85.475,77.787
  Top Layer w0.4: 五向按键1_1.6@98.219,41.587 98.365,41.733 R19.1@98.365,44.559
  Top Layer w1.5: P8.4@84.455,65.786 P3.4@84.455,68.326
  Bottom Layer w0.152: 85.319,49.868 85.319,56.617 v4(87.503,58.801)
  Bottom Layer w0.254: v4(87.503,58.801) 92.418,58.801 v4(94.577,60.96)
  Bottom Layer w0.3: v2(82.705,41.203) 84.689,43.187 93.057,43.187 95.184,41.06 v1(97.857,41.06)
KEY-Left: P3.2@79.375,68.326 P8.2 R1.2@76.873,60.96 R18.2 U1.10@84.475,77.787 U3.12 五向按键1.1 五向按键1_1.3 | length 50.7
  Top Layer w0.152: 五向按键1_1.3@92.562,35.243 五向按键1_1.3@92.562,35.523
  Top Layer w0.254: R1.2@76.873,60.96 79.375,60.96 ; P8.2@79.375,65.786 79.375,60.96 ; P3.2@79.375,68.326 84.475,73.426 U1.10@84.475,77.787 ; 五向按键1.1@81.915,53.149 79.375,55.689 79.375,60.96
  Top Layer w0.4: 五向按键1_1.3@92.562,35.243 R18.2@93.78,34.024
  Top Layer w1.5: P8.2@79.375,65.786 P3.2@79.375,68.326
  Bottom Layer w0.3: v2(83.059,40.849) 84.933,42.724 92.733,42.724 93.907,41.549 93.907,36.71 v1(92.923,35.726)
KEY-Right: P3.5 P8.5 R6.1 R15.1 U1.13 U3.14 五向按键1.6 五向按键1_1.4 | length 46.2
  Top Layer w0.152: v1(96.224,43.176) 五向按键1_1.4@96.224,43.653
  Top Layer w0.254: U1.13@85.975,77.787 85.975,69.346 P3.5@86.995,68.326 ; P8.5@86.995,65.786 86.995,61.468 89.535,58.928 89.535,56.769 93.345,52.959 R6.1@94.577,52.959
  Top Layer w0.4: R15.1@95.089,44.788 五向按键1_1.4@96.224,43.653
  Top Layer w1.5: P8.5@86.995,65.786 P3.5@86.995,68.326
  Bottom Layer w0.3: v2(82.352,41.557) 84.497,43.702 95.698,43.702 v1(96.224,43.176)
KEY-Up: P3.3 P8.3 R5.2 R14.2 U1.11@84.975,77.787 U3.11 五向按键1.3 五向按键1_1.1 | length 51.2
  Top Layer w0.152: U3.11@83.412,40.496 U3.11@83.412,40.547 ; 五向按键1_1.1@90.39,37.342 v1(90.566,37.519)
  Top Layer w0.254: R5.2@76.873,52.959 78.778,51.054 83.947,51.054 83.947,54.102 80.899,57.15 80.899,58.42 81.915,59.436 P8.3@81.915,65.786 ; P3.3@81.915,68.326 84.975,71.386 U1.11@84.975,77.787
  Top Layer w0.3: U3.11@83.412,40.496 84.465,41.549 v1(84.77,41.549)
  Top Layer w0.4: 五向按键1_1.1@90.39,37.342 90.39,34.1 R14.2@90.536,33.954
  Top Layer w1.5: P8.3@81.915,65.786 P3.3@81.915,68.326
  Bottom Layer w0.152: v1@84.76,41.539 85.792,40.507 86.853,40.507 87.424,39.936 87.424,38.964 88.021,38.368 89.825,38.368 90.566,37.626 v1(90.566,37.519)
LED: R2_1.2 U3.30 | length 12.4
  Top Layer w0.3: v1(74.165,33.307) 76.223,33.307 U3.30@80.089,37.172
  Bottom Layer w0.3: R2_1.2@69.707,32.202 70.812,33.307 v1(74.165,33.307)
LED1: R6_1.2 U3.21 | length 12.6
  Bottom Layer w0.254: v2@79.301,40.974 cw(c79.382,40.849) v2@79.458,40.722
  Bottom Layer w0.3: R6_1.2@69.707,45.01 69.707,43.708 70.382,43.033 70.924,43.033 72.859,41.098 79.133,41.098 v2(79.382,40.849)
LED2: pad.0@73.609,47.955 R5_1.2 U3.22 | length 46.1
  Top Layer w0.152: v4(67.513,64.414) 71.425,68.326 77.445,68.326
  Bottom Layer w0.152: R5_1.2@66.278,46.534 66.278,63.18 v4(67.513,64.414)
  Bottom Layer w0.254: v2@79.104,40.368 ccw(c79.028,40.496) v2@79.161,40.43
  Bottom Layer w0.3: R5_1.2@66.278,46.534 67.244,45.568 67.244,44.095 68.758,42.581 70.708,42.581 72.672,40.616 78.908,40.616 v2(79.028,40.496)
LED3: R8_1.2 U3.23 | length 15.2
  Bottom Layer w0.254: v2@78.718,40 ccw(c78.675,40.142) v2@78.808,40.077
  Bottom Layer w0.3: R8_1.2@66.278,45.01 66.278,43.953 68.103,42.128 70.469,42.128 72.433,40.164 78.653,40.164 v2(78.675,40.142)
Motor: R26.2 U3.18 | length 4.4
  Top Layer w0.3: v1(80.312,40.59) 80.846,41.123 80.846,41.507 U3.18@80.442,41.91
  Bottom Layer w0.3: R26.2@78.553,42.324 78.947,42.324 80.312,40.958 v1(80.312,40.59)
NetBAT-1_2: BAT-1.2 BAT-1_1.2 P1.2@64.887,117.643 pad.0@64.836,111.211 pad.0@64.837,112.501 pad.0@66.148,111.211 pad.0@66.149,111.856 pad.0@66.149,112.501 pad.0@69.125,113.799 U2.1 U2_1.1 | length 13.9
  Top Layer w0.24: v3(69.125,113.799) 70.004,113.799 U2.1@71.29,112.513 ; BAT-1_1.2@70.46,34.754 U2_1.1@70.46,35.675
  Top Layer w0.6: P1.2@64.887,117.643 65.281,117.643 v3(69.125,113.799) 67.365,113.799 v3(65.443,111.877)
NetC11_2: C11.2 U4.10 | length 3.4
  Top Layer w0.152: U4.10@85.176,45.359 87.716,45.359 C11.2@88.351,44.724
NetC13_1: C13.1 OLED1.2
  other v2: 86.592,36.551
NetC14_1: C14.1 R24.2 R25.1 U*1.3 | length 3.3
  Bottom Layer w0.152: R25.1@90.936,34.513 R25.1@90.936,34.955
  Bottom Layer w0.3: v1(89.437,34.513) R25.1@90.936,34.513 ; R25.1@90.936,34.955 U*1.3@91.914,35.933
NetC14_2: C14.2 D1_1.2 OLED1.1 R24.1 | length 1.4
  Bottom Layer w0.152: v1(87.837,34.513) R24.1@87.862,34.538
  Bottom Layer w0.3: R24.1@87.862,34.538 v2(87.862,35.931)
NetD1_1: D1.1 D1_1.1 I3.2 R3.2@76.5,104.859 R10.2 U*1.1 | length 8
  Top Layer w0.254: R10.2@102.908,68.199 D1.1@104.61,68.199
  Top Layer w0.6: D1.1@74.876,104.866 76.492,104.866 R3.2@76.5,104.859
  Bottom Layer w0.152: U*1.1@91.693,37.833 U*1.1@91.914,37.833
  Bottom Layer w0.254: D1_1.1@87.862,39.331 D1_1.1@88.059,39.331
  Bottom Layer w0.4: D1_1.1@88.059,39.331 90.195,39.331 U*1.1@91.693,37.833
NetD2_1: D2.1 R4.2@69.426,104.846 R11.2 | length 3.4
  Top Layer w0.508: R11.2@102.108,60.363 D2.1@102.108,62.129
  Top Layer w0.6: D2.1@67.782,104.851 69.421,104.851 R4.2@69.426,104.846
NetD3_1: D3.1 R12.2 | length 1.8
  Top Layer w0.508: R12.2@103.886,60.363 D3.1@103.886,62.129
NetD4_1: D4.1 R13.2 | length 1.8
  Top Layer w0.508: R13.2@105.664,60.363 D4.1@105.664,62.129